# Altium PCB Bus_Interface_for_ABB-Welcome_v2.pcbdoc
Units mm, origin at the board's own origin, x right, y up, seen from the top; angles counter-clockwise.
Board outline 89.88 x 85.4 mm, 2 copper layers (Top Layer, Bottom Layer); 60 components, 36 nets, 173 pads, 82 vias.
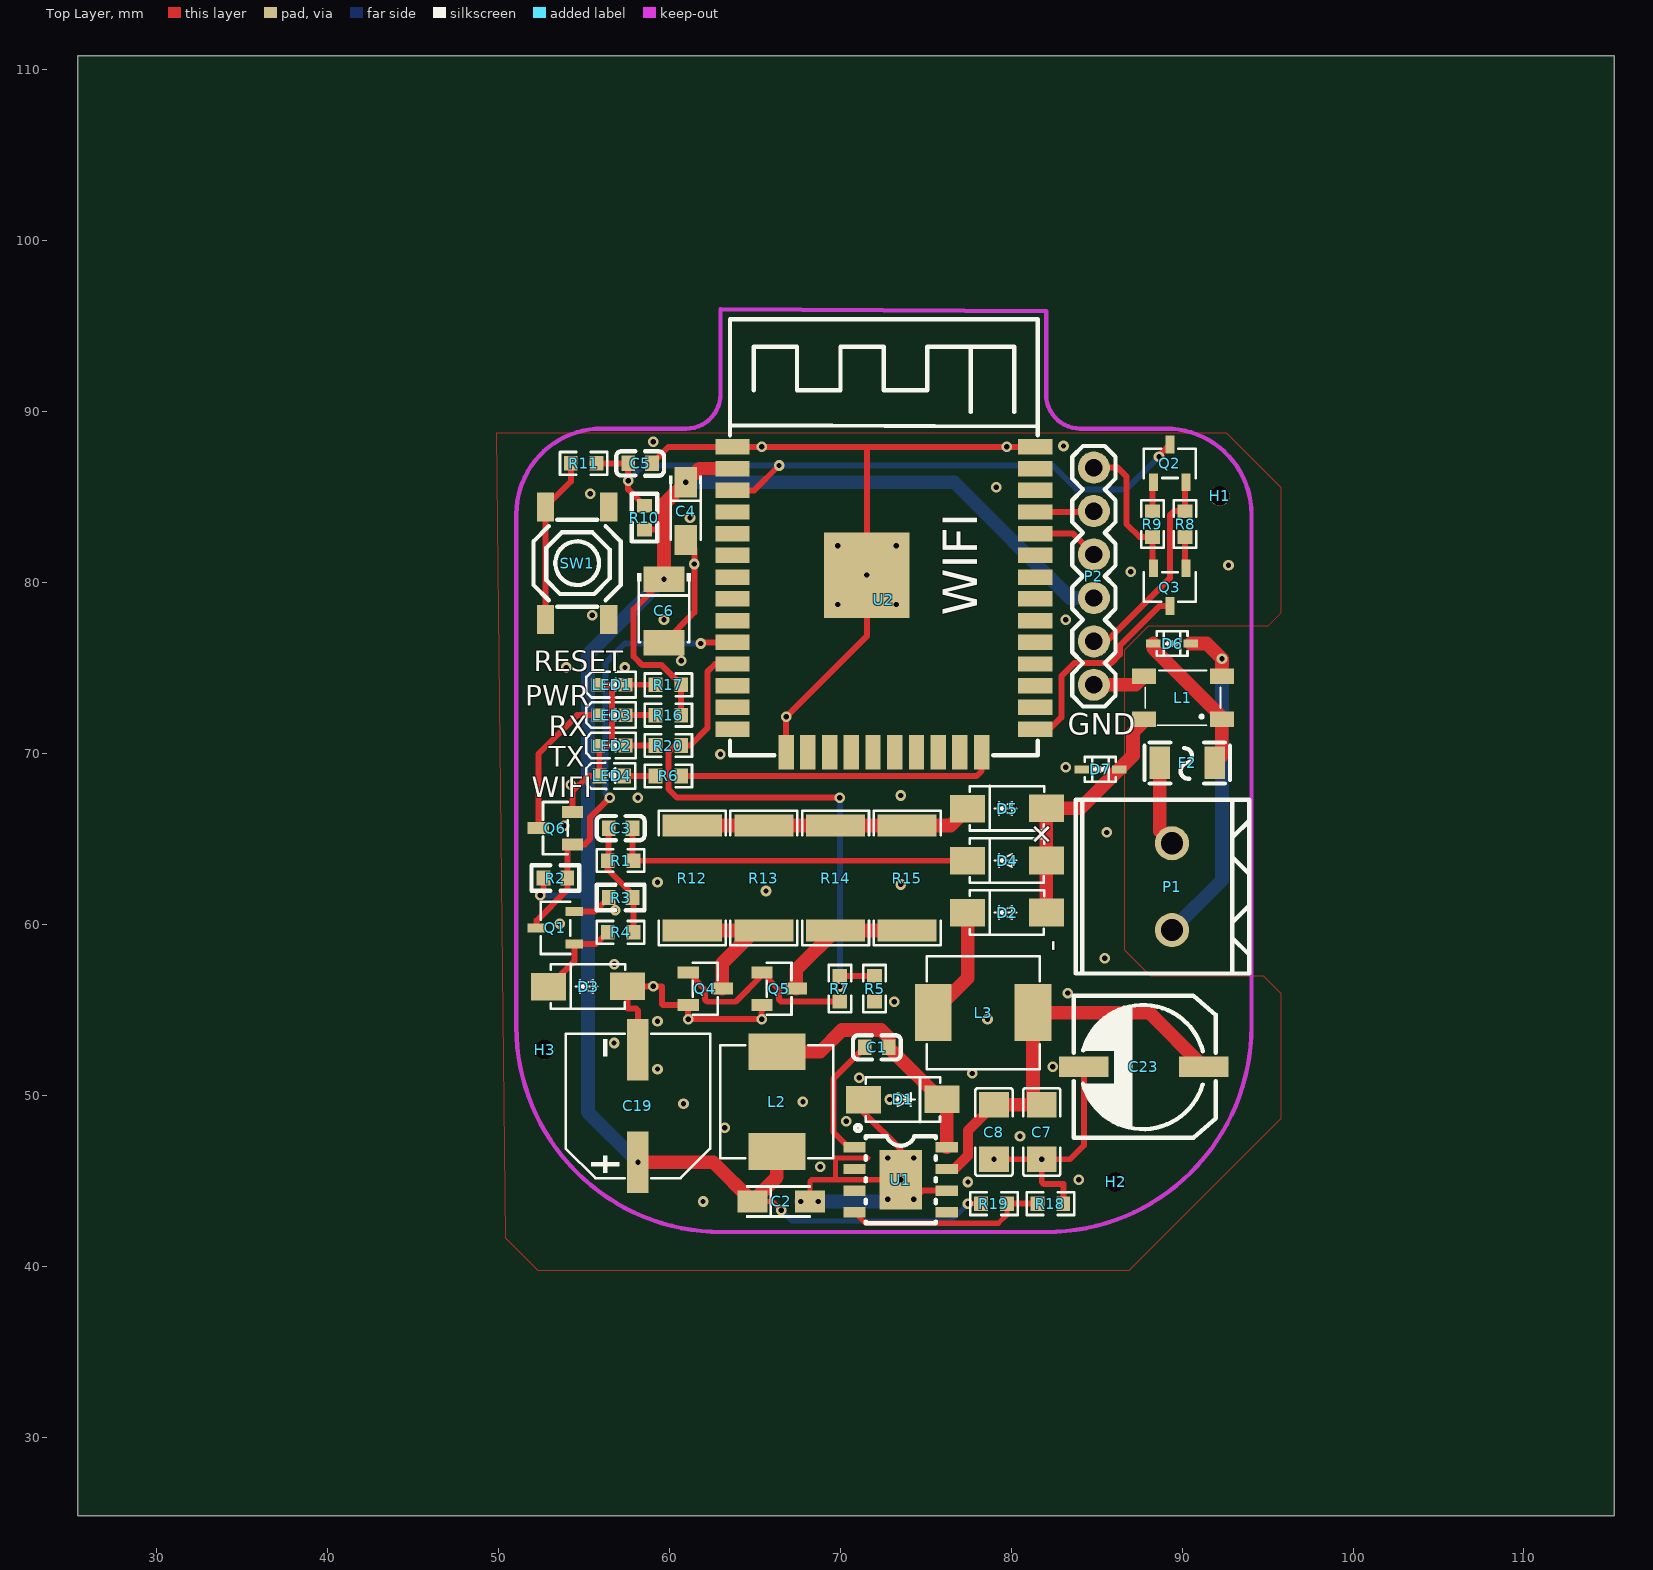
[diagram p0: Top Layer view]
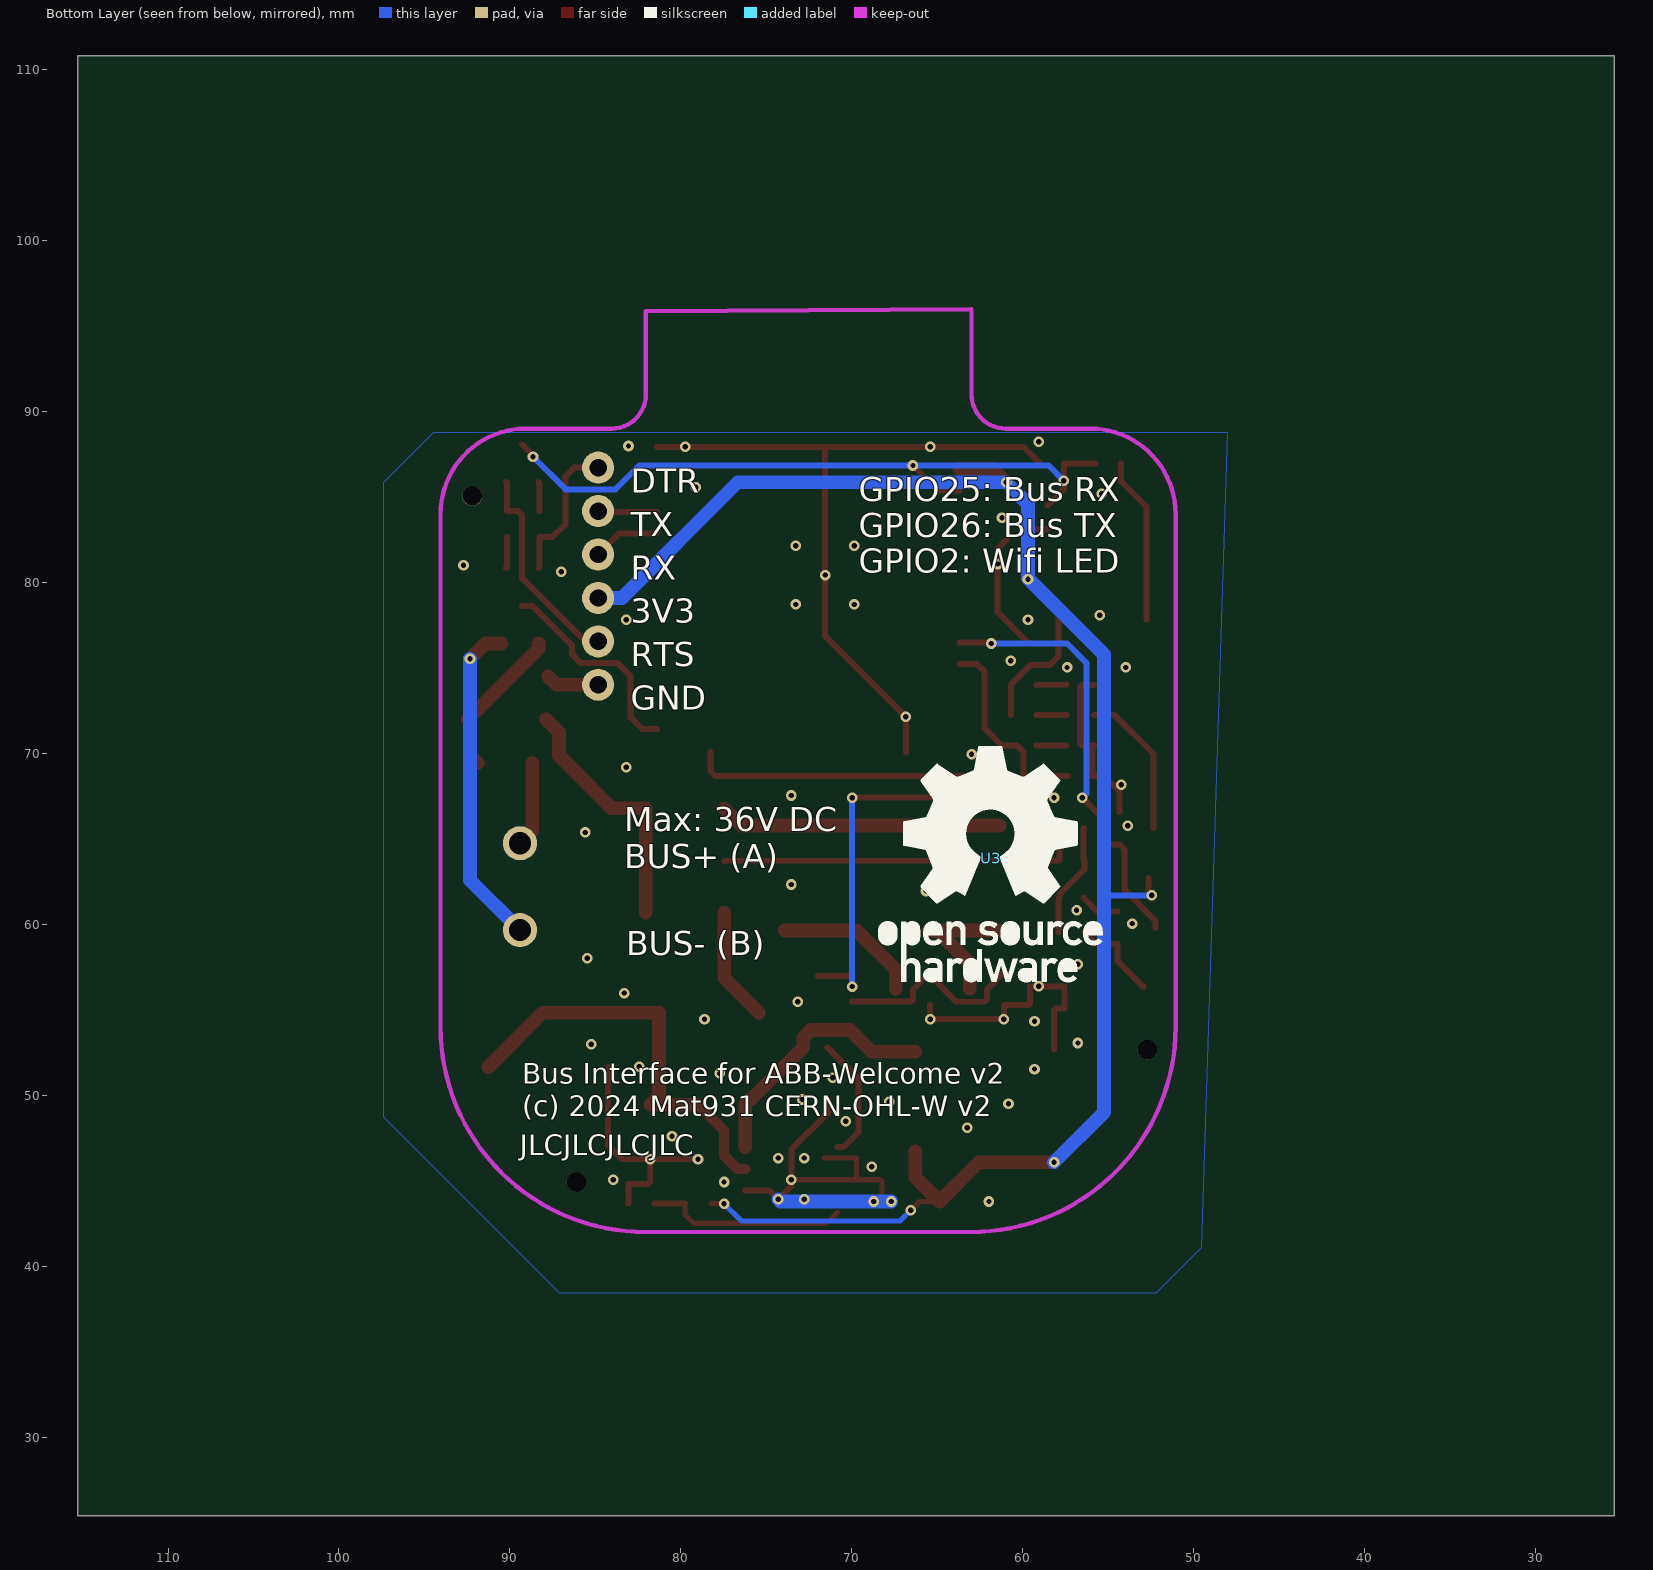
[diagram p1: Bottom Layer view, seen from below]

## Layer stack, top to bottom
Top Layer: signal copper (thickness not stored)
Dielectric: dielectric 0.32, FR-4, Dk 4.8
Bottom Layer: signal copper (thickness not stored)

## Board outline
115.282,25.4 25.4,25.4 25.4,110.8 115.282,110.8

## Components (designator, comment, footprint, x,y, rotation, side; value= is the part's Value field where it differs from the comment)
C1 "10nF" C0603#1 72.14,52.794 r180 top
C2 "10uF" CAP-SMD_L3.2-W1.6-RD-C7171 66.552,43.777 r0 top
C3 "68nF" C0603#1 57.154,65.621 r180 top
C4 "10uF" CAP-SMD_L3.2-W1.6-RD-C7171 60.964,84.163 r270 top
C5 "100nF" C0603#2 58.297,86.957 r180 top
C6 "100uF" CASE-B_3528 59.694,78.321 r270 top
C7 "2.2uF" C1206 81.792,47.841 r90 top
C8 "2.2uF" C1206 78.998,47.841 r90 top
C19 "470uF" CAP-SMD_BD8.0-L8.3-W8.3-LS9.0-FD 58.17,49.365 r90 top
C23 "100uF" CAP-SMD_BD8.0-L8.3-W8.3-RD 87.761,51.651 r0 top
D1 "SS24" SMA_L4.3-W2.6-LS5.0-FD 73.664,49.746 r0 top
D2 "SS24" SMA_L4.3-W2.6-LS5.0-FD 79.76,60.668 r180 top
D3 "SS24" SMA_L4.3-W2.6-LS5.0-FD 55.249,56.35 r180 top
D4 "SS24" SMA_L4.3-W2.6-LS5.0-FD 79.76,63.716 r180 top
D5 "SS24" SMA_L4.3-W2.6-LS5.0-FD 79.76,66.764 r180 top
D6 "SD36C_C502537" SOD-323_L1.7-W1.3-LS2.7-BI 89.412,76.416 r180 top
D7 "SD36C_C502537" SOD-323_L1.7-W1.3-LS2.7-BI 85.221,69.05 r0 top
F2 "nSMD005" F1206 90.301,69.431 r0 top
H1 "Tooling Hole" "TOOLING HOLE JLCPCB" 92.206,85.052 r0 top
H2 "Tooling Hole" "TOOLING HOLE JLCPCB" 86.11,44.92 r0 top
H3 "Tooling Hole" "TOOLING HOLE JLCPCB" 52.709,52.667 r0 top
L1 "ACT45B-510-2P-TL003" IND-SMD_4P-L4.5-W3.2-TL 90.047,73.241 r180 top
L2 "100uH" IND-SMD_L7.1-W6.6 66.298,49.619 r270 top
L3 "100uH" IND-SMD_L7.1-W6.6 78.363,54.826 r0 top
LED1 "Red" LED0603-RD 56.646,74.003 r0 top
LED2 "Yellow" LED0603-RD-YELLOW 56.646,70.447 r0 top
LED3 "Yellow" LED0603-RD-YELLOW 56.646,72.225 r0 top
LED4 "Blue" LED0603-FD_BLUE 56.646,68.669 r0 top
P1 "WJ500V-5.08-2P-14-00A" CONN-TH_2P-P5.00_WJ500V-5.08-2P 89.412,62.192 r90 top
P2 "FTDI Header" "FTDI HEADER" 84.84,80.353 r90 top
Q1 "S8050_C2146" SOT-23-3_L3.0-W1.7-P0.95-LS2.9-BR 53.344,59.779 r0 top
Q2 "S8050_C2146" SOT-23-3_L3.0-W1.7-P0.95-LS2.9-BR 89.285,86.957 r270 top
Q3 "S8050_C2146" SOT-23-3_L3.0-W1.7-P0.95-LS2.9-BR 89.285,79.718 r90 top
Q4 "2N7002" SOT-23-3_L2.9-W1.3-P1.90-LS2.4-BR 62.107,56.223 r180 top
Q5 "2N7002" SOT-23-3_L2.9-W1.3-P1.90-LS2.4-BR 66.425,56.223 r180 top
Q6 "2N7002" SOT-23-3_L2.9-W1.3-P1.90-LS2.4-BR 53.344,65.621 r0 top
R1 "100kΩ" R0603#1 57.154,63.716 r180 top
R2 "10K" R0603#2 53.344,62.7 r180 top
R3 "10K" R0603#2 57.154,61.557 r0 top
R4 "1kΩ" R0603#1 57.154,59.525 r180 top
R5 "1kΩ" R0603#1 72.013,56.223 r90 top
R6 "1kΩ" R0603#1 59.948,68.669 r0 top
R7 "75Ω" R0603#1 69.981,56.223 r270 top
R8 "100kΩ" R0603#1 90.174,83.401 r270 top
R9 "100kΩ" R0603#1 88.269,83.401 r90 top
R10 "10K" R0603#2 58.551,83.782 r270 top
R11 "150Ω" R0603#1 54.995,86.957 r0 top
R12 "820Ω" R2512 61.345,62.7 r90 top
R13 "820Ω" R2512 65.536,62.7 r90 top
R14 "820Ω" R2512 69.727,62.7 r90 top
R15 "820Ω" R2512 73.918,62.7 r90 top
R16 "150Ω" R0603#1 59.948,72.225 r0 top
R17 "1kΩ" R0603#1 59.948,74.003 r0 top
R18 "3.3kΩ" R0603#1 82.3,43.65 r180 top
R19 "5.6kΩ" R0603#1 78.998,43.65 r180 top
R20 "150Ω" R0603#1 59.948,70.447 r0 top
SW1 "TS-1187A-B-A-B" SW-SMD_4P-L5.1-W5.1-P3.70-LS6.5-TL-2 54.614,81.115 r90 top
U1 "TPS5430DDAR" ESOP-8_L4.9-W3.9-P1.27-LS6.0-TL-EP 73.537,45.047 r0 top
U2 "ESP32-SOLO-1" WIFIM-SMD_38P-L25.5-W18.0-P1.27 72.558,78.989 r0 top
U3 "logo open source hardware" "LOGO OPEN SOURCE HARDWARE" 61.853,63.843 r0 bottom

## Footprints (in the part's own frame and the unit in brackets; to place one, negate y for a bottom-side part, rotate by r counter-clockwise, add the part's x,y. Pads: shape width x height; smd on the part's side, far side on the other; paste and mask are expansions set on the pad)
C0603#1 [mm]
  rect 0.8x0.9 smd paste+0 mask+0.051: 1(-0.7,0) 2(0.7,0)
  silkscreen extent -1.41,-0.71 1.39,0.72
C0603#2 [mm]
  rect 0.8x0.9 smd paste+0 mask+0.102: 1(-0.7,0) 2(0.7,0)
  silkscreen extent -1.4,-0.7 1.4,0.72
C1206 [mm]
  rect 1.485x1.728 smd paste-100 mask+0.051: 1(-1.593,0) 2(1.593,0)
  silkscreen extent -2.56,-1.09 2.56,1.09
CAP-SMD_BD8.0-L8.3-W8.3-LS9.0-FD [mm]
  rect 3.61x1.26 smd paste+0 mask+0.051: 1(-3.295,0) 2(3.295,0)
  silkscreen extent -4.23,-4.23 4.23,4.23
CAP-SMD_BD8.0-L8.3-W8.3-RD [mm]
  rect 2.9x1.2 smd paste+0 mask+0.102: 1(3.5,-0.005) 2(-3.5,0.005)
  silkscreen extent -4.1,-4.15 4.21,4.16
CAP-SMD_L3.2-W1.6-RD-C7171 [mm]
  rect 1.758x1.296 smd paste+0 mask+0.051: 1(-1.686,0) 2(1.686,0)
  silkscreen extent -2.06,-0.95 1.68,0.95
CASE-B_3528 [mm]
  rect 1.506x2.376 smd paste+0 mask+0.051: 1(-1.861,0) 2(1.861,0)
  silkscreen extent -2.21,-1.55 1.83,1.55
CONN-TH_2P-P5.00_WJ500V-5.08-2P [mm]
  round 2 hole 1.3 paste+0 mask+0.051: 1(-2.54,0) 2(2.54,0)
  silkscreen extent -5.08,-4.52 5.08,5.64
ESOP-8_L4.9-W3.9-P1.27-LS6.0-TL-EP [mm]
  rect 1.3x0.6 smd paste+0 mask+0.051: 1(-2.7,1.905) 2(-2.7,0.635) 3(-2.7,-0.635) 4(-2.7,-1.905) 5(2.7,-1.905) 6(2.7,-0.635) 7(2.7,0.635) 8(2.7,1.905)
  rect 2.5x3.5 smd paste+0 mask+0.051: 9(0,0)
  silkscreen extent -2.67,-2.55 2.05,3.2
F1206 [mm]
  rect 1.2x1.9 smd paste+0 mask+0.102: 1(-1.6,0) 2(1.6,0)
  silkscreen extent -2.5,-1.2 2.5,1.2
"FTDI HEADER" [mil]
  round 74 hole 40 paste+0 mask+4: 1(-250,0) 2(-150,0) 3(-50,0) 4(50,0) 5(150,0) 6(250,0)
  silkscreen extent -300,-50 300,50
IND-SMD_4P-L4.5-W3.2-TL [mm]
  rect 1.4x0.9 smd paste+0 mask+0.051: 1(-2.28,1.25) 2(-2.28,-1.25) 3(2.28,-1.25) 4(2.28,1.25)
  silkscreen extent -2.2,-1.6 2.2,1.6
IND-SMD_L7.1-W6.6 [mm]
  rect 2.15x3.32 smd paste+0 mask+0.051: 1(-2.913,0) 2(2.913,0)
  silkscreen extent -3.3,-3.3 3.3,3.3
LED0603-FD_BLUE [mm]
  rect 0.8x0.9 smd paste+0 mask+0.051: 1(-0.72,0) 2(0.72,0)
  silkscreen extent -1.5,-0.76 1.38,0.76
LED0603-RD [mm]
  rect 0.8x0.8 smd paste+0 mask+0.051: 1(-0.799,-0.003) 2(0.799,0.004)
  silkscreen extent -1.49,-0.75 1.39,0.76
LED0603-RD-YELLOW [mm]
  rect 0.8x0.8 smd paste+0 mask+0.051: 1(-0.799,-0.003) 2(0.799,0.004)
  silkscreen extent -1.49,-0.75 1.39,0.76
"LOGO OPEN SOURCE HARDWARE" [mm]
  silkscreen extent -6.52,-6.56 6.61,7.24
R0603#1 [mm]
  rect 0.806x0.864 smd paste-100 mask+0.051: 1(-0.753,0) 2(0.753,0)
  silkscreen extent -1.39,-0.66 1.39,0.66
R0603#2 [mm]
  rect 0.8x0.9 smd paste+0 mask+0.102: 1(-0.7,0) 2(0.7,0)
  silkscreen extent -1.4,-0.75 1.4,0.76
R2512 [mm]
  rect 1.283x3.456 smd paste-100 mask+0.051: 1(-3.066,0) 2(3.066,0)
  silkscreen extent -3.94,-1.96 3.94,1.96
SMA_L4.3-W2.6-LS5.0-FD [mm]
  rect 2.046x1.62 smd paste+0 mask+0.051: 1(-2.304,-0.009) 2(2.304,0.009)
  silkscreen extent -2.17,-1.32 2.19,1.29
SOD-323_L1.7-W1.3-LS2.7-BI [mm]
  rect 0.845x0.455 smd paste+0 mask+0.051: 1(-1.098,0) 2(1.098,0)
  silkscreen extent -0.9,-0.73 0.9,0.73
SOT-23-3_L2.9-W1.3-P1.90-LS2.4-BR [mm]
  rect 1.25x0.7 smd paste+0 mask+0.051: 1(1,-0.95) 2(1,0.95) 3(-1,0)
  silkscreen extent -0.73,-1.53 0.73,1.53
SOT-23-3_L3.0-W1.7-P0.95-LS2.9-BR [mm]
  rect 1.037x0.532 smd paste+0 mask+0.051: 1(1.101,-0.95) 2(1.101,0.95) 3(-1.101,0)
  silkscreen extent -0.86,-1.53 0.86,1.53
SW-SMD_4P-L5.1-W5.1-P3.70-LS6.5-TL-2 [mm]
  rect 1.7x1 smd paste+0 mask+0.051: 1(-3.3,1.85) 2(3.3,1.85) 3(-3.3,-1.85) 4(3.3,-1.85)
  silkscreen extent -2.55,-2.55 2.55,2.55
"TOOLING HOLE JLCPCB" [mm]
  round 1.152 hole 1.152 unplated paste+0: ""(0,0)
  Top Layer pour cut-out: -0.7,0 -0.631,0.304 -0.436,0.547 -0.156,0.682 0.156,0.682 0.436,0.547 0.631,0.304 0.7,0 0.7,0 0.631,-0.304 0.436,-0.547 0.156,-0.682 -0.156,-0.682 -0.436,-0.547 -0.631,-0.304 -0.7,0 -0.7,0
  Bottom Layer pour cut-out: -0.7,0 -0.631,0.304 -0.436,0.547 -0.156,0.682 0.156,0.682 0.436,0.547 0.631,0.304 0.7,0 0.7,0 0.631,-0.304 0.436,-0.547 0.156,-0.682 -0.156,-0.682 -0.436,-0.547 -0.631,-0.304 -0.7,0 -0.7,0
WIFIM-SMD_38P-L25.5-W18.0-P1.27 [mm]
  rect 2x0.9 smd paste+0 mask+0.051: 1(-8.85,8.93) 2(-8.85,7.66) 3(-8.85,6.39) 4(-8.85,5.12) 5(-8.85,3.85) 6(-8.85,2.58) 7(-8.85,1.31) 8(-8.85,0.04) 9(-8.85,-1.23) 10(-8.85,-2.5) 11(-8.85,-3.77) 12(-8.85,-5.04) 13(-8.85,-6.31) 14(-8.85,-7.58) 25(8.85,-7.58) 26(8.85,-6.31) 27(8.85,-5.04) 28(8.85,-3.77) 29(8.85,-2.5) 30(8.85,-1.23) 31(8.85,0.04) 32(8.85,1.31) 33(8.85,2.58) 34(8.85,3.85) 35(8.85,5.12) 36(8.85,6.39) 37(8.85,7.66) 38(8.85,8.93)
  rect 0.9x2 smd paste+0 mask+0.051: 15(-5.715,-8.93) 16(-4.445,-8.93) 17(-3.175,-8.93) 18(-1.905,-8.93) 19(-0.635,-8.93) 20(0.635,-8.93) 21(1.905,-8.93) 22(3.175,-8.93) 23(4.445,-8.93) 24(5.715,-8.93)
  rect 5x5 smd paste+0 mask+0.051: 39(-1,1.43)
  silkscreen extent -9,-9.1 9,16.4

## Via types
v1: diameter 0.62, hole 0.31, Top Layer to Bottom Layer, tented both sides, 82 vias

## Nets (pads, with @x,y where several pads share a name; then routed paths per layer and width w, separated by ;. In a path a pad name is that pad's centre, name@x,y a point inside that pad or via, vN(x,y) a via of type N, cw(c..) or ccw(c..) an arc to the next point about the centre after c; other vN are vias at no path point)
3V3: C2.1 C4.1 C6.1 C19.1 L2.2 P2.3 R2.2 R10.2 R16.2 R17.2 R19.2 U2.2 | length 120.4
  Top Layer w0.3: C2.1 66.044,43.777 v1(66.552,43.269) ; v1(77.474,43.65) R19.2
  Top Layer w0.35: v1(52.455,61.684) 52.644,61.873 R2.2 ; R10.2 59.694,83.082 ; v1(59.694,80.181) 57.916,78.403 57.916,75.654 58.424,75.146 59.558,75.146 R17.2 R16.2
  Top Layer w0.8: v1(58.17,46.07) 62.573,46.07 C2.1 66.298,45.209 L2.2 ; v1(59.694,80.181) 59.694,84.579 v1(60.964,85.849) 61.764,86.649 U2.2
  Bottom Layer w0.3: v1(66.552,43.269) 67.187,42.634 76.458,42.634 v1(77.474,43.65)
  Bottom Layer w0.35: v1(52.455,61.684) 55.086,61.684 55.249,61.521
  Bottom Layer w0.8: v1(58.17,46.07) 55.249,48.992 55.249,75.781 59.694,80.226 59.694,84.579 v1(60.964,85.849) 76.676,85.849 83.443,79.083 P2.3
BUS_PWR: C7.2 C8.2 C23.1 L3.2 U1.7 | length 24.9
  Top Layer w0.6: U1.7@76.237,45.682 76.712,45.682 77.474,46.444 77.474,47.909 C8.2
  Top Layer w0.8: C8.2 C7.2 81.276,49.95 L3.2 88.081,54.826 C23.1
BUS_RX: C3.1 D4.2 R1.1 | length 21.5
  Top Layer w0.35: C3.1 57.854,63.769 R1.1 ; R1.1@57.908,63.716 D4.2@77.456,63.706
BUS_RX_PIN: Q1.3 Q6.1 R2.1 U2.10 | length 25.7
  Top Layer w0.35: Q1.3 52.243,60.202 54.044,62.003 R2.1 54.044,64.371 Q6.1 55.061,64.671 55.376,64.986 55.376,66.256 v1(56.519,67.399) ; v1(61.853,76.416) 61.926,76.489 U2.10
  Bottom Layer w0.35: v1(56.519,67.399) 56.265,67.653 56.265,75.273 57.408,76.416 v1(61.853,76.416)
BUS_TX: D5.2 R12.2 R13.2 R14.2 R15.2 | length 16.5
  Top Layer w0.8: R12.2 R15.2 76.468,65.766 D5.2
BUS_TX_PIN: R5.2 R7.1 R20.2 U2.11 | length 33.9
  Top Layer w0.35: R20.2 60.329,70.447 59.948,70.066 59.948,67.907 60.456,67.399 v1(69.981,67.399) ; R20.2@60.702,70.447 61.218,70.447 62.234,71.463 62.234,74.765 62.689,75.22 U2.11 ; v1(69.981,56.35) R7.1 R5.2
  Bottom Layer w0.35: v1(69.981,56.35) v1(69.981,67.399)
D0: Q3.3 U2.25 | length 12.6
  Top Layer w0.35: U2.25@81.408,71.41 82.247,71.41 82.935,72.098 82.935,74.511 83.697,75.273 85.856,75.273 86.364,75.781 86.364,76.289 88.691,78.616 Q3.3
D2_2: D2.2 L3.1 | length 6.7
  Top Layer w0.8: L3.1 77.456,56.832 D2.2
DTR: P2.6 Q3.2 R9.1 | length 8.6
  Top Layer w0.35: P2.6 86.237,86.703 86.745,86.195 86.745,83.401 87.515,82.647 R9.1 ; R9.1 88.269,80.885 Q3.2
EN: C5.2 Q2.3 R10.1 R11.2 U2.3 | length 41.8
  Top Layer w0.35: R11.2 C5.2 v1(57.597,85.945) 57.597,85.436 R10.1 ; U2.3 64.974,85.379 v1(66.425,86.83) ; v1(88.65,87.338) 88.65,87.423 Q2.3
  Bottom Layer w0.35: v1(57.597,85.945) 58.482,86.83 v1(66.425,86.83) 82.427,86.83 83.824,85.433 86.745,85.433 v1(88.65,87.338)
F2_1: F2.1 P1.2 | length 5
  Top Layer w0.8: F2.1 88.701,65.443 P1.2
GND: C2.2 C4.2 C5.1 C6.2 C7.1 C8.1 C19.2 C23.2 D1.1 D3.1 D7.1 L1.3 LED1.1 LED2.1 LED4.1 P2.1 Q1.2 Q4.2 Q5.2 Q6.2 R3.1 R5.1 R18.1 SW1.3 SW1.4 U1.6 U1.9 U2.1 U2.15 U2.38 U2.39 | length 119.4
  Top Layer w0.3: C2.2 68.238,44.955 68.33,45.047 v1(73.537,45.047) ; 69.727,45.047 69.727,46.317 71.632,46.317
  Top Layer w0.35: Q6.2 54.344,67.764 55.249,68.669 LED4.1 55.926,70.364 LED2.1 ; Q1.2 55.626,60.729 R3.1 ; LED2.1 56.516,70.444 56.646,70.574 56.646,72.225 56.646,73.876 56.521,74 LED1.1 ; C19.2 58.17,54.953 58.043,55.08 57.553,55.08 D3.1 v1(59.064,56.359) 59.567,56.359 59.567,55.334 59.628,55.273 Q4.2 ; C5.1 59.959,87.919 U2.1 v1(65.415,87.919) v1(79.742,87.919) U2.38 ; C6.2 61.472,78.238 v1(61.472,81.066) 61.472,81.969 C4.2 ; Q4.2 v1(61.106,54.445) v1(65.409,54.445) Q5.2 ; U2.15 v1(66.843,72.135) 71.558,76.85 v1(71.558,80.419) 71.558,87.919 ; D1.1@71.36,49.736 71.36,49.002 73.537,46.825 v1(73.537,45.047) 73.537,44.666 v1(74.299,43.904) 74.807,44.412 U1.6@76.237,44.412 ; v1(78.998,46.248) v1(81.792,46.248) ; R18.1 83.053,44.793 81.919,44.793 81.792,44.92 v1(81.792,46.248) ; C23.2 84.261,47.066 83.443,46.248 v1(81.792,46.248)
  Top Layer w0.8: P2.1 87.279,74.003 L1.3
  Bottom Layer w0.8: v1(67.695,43.777) 74.172,43.777 v1(74.299,43.904)
  other v1: 61.98,43.777 68.711,43.777 72.775,43.904 77.474,44.92 83.951,45.047 68.838,45.809 72.775,46.317 74.299,46.317 80.522,47.587 63.25,48.095 70.362,48.476 60.837,49.492 67.822,49.619 72.902,49.746 71.124,51.016 77.728,51.27 59.313,51.524 82.427,51.651 85.244,52.971 56.773,53.048 59.313,54.318 78.617,54.445 73.156,55.461 83.316,55.969 56.787,57.659 85.475,58.001 53.598,60.033 56.854,60.807 65.663,61.938 73.537,62.319 59.313,62.446 85.602,65.367 53.852,65.748 58.17,67.399 73.537,67.526 54.233,68.161 83.189,69.177 62.996,69.939 53.979,75.019 57.408,75.019 60.71,75.4 59.694,77.813 83.189,77.813 55.503,78.067 69.854,78.702 73.283,78.702 86.999,80.607 92.714,80.988 69.854,82.131 73.283,82.131 61.218,83.782 55.376,85.179 79.125,85.56 83.062,87.973 59.059,88.227
L1_1: D6.2 F2.2 L1.1 | length 8.9
  Top Layer w0.8: D6.2 88.314,76.13 L1.1@92.454,71.991 ; F2.2@91.901,69.431 92.327,69.857 L1.1
L1_2: D6.1 L1.2 P1.1 | length 20.3
  Top Layer w0.8: D6.1 91.444,76.416 v1(92.333,75.527) L1.2@92.328,74.491
  Bottom Layer w0.8: P1.1 92.333,62.573 v1(92.333,75.527)
L1_4: D2.1 D4.1 D5.1 D7.2 L1.4 | length 14.9
  Top Layer w0.8: D2.1 D5.1 84.042,66.773 D7.2 87.126,69.857 87.126,71.223 L1.4@87.894,71.991
LED1_2: LED1.2 R17.1 | length 1.7
  Top Layer w0.35: LED1.2@57.446,74.005 R17.1
LED2_2: LED2.2 R20.1 | length 1.7
  Top Layer w0.35: LED2.2@57.446,70.449 R20.1
LED3_1: LED3.1 Q6.3 | length 8.8
  Top Layer w0.35: Q6.3 52.344,69.955 54.611,72.221 LED3.1
LED3_2: LED3.2 R16.1 | length 1.7
  Top Layer w0.35: LED3.2@57.446,72.227 R16.1
LED_PIN: R6.2 U2.24 | length 18.8
  Top Layer w0.35: R6.2 77.982,68.669 78.273,68.96 U2.24
Q1_1: D3.2 Q1.1 R4.2 | length 5.4
  Top Layer w0.35: D3.2 54.445,57.841 Q1.1 55.705,58.829 R4.2
Q2_1: Q2.1 R9.2 | length 1.7
  Top Layer w0.35: R9.2 88.269,85.789 Q2.1
Q3_1: Q3.1 R8.2 | length 1.9
  Top Layer w0.35: R8.2 90.174,80.88 Q3.1
Q4_1: Q4.1 Q5.1 R7.2 | length 11.8
  Top Layer w0.35: Q4.1 62.107,56.173 62.107,55.588 62.234,55.461 63.885,55.461 65.425,57.001 Q5.1 66.425,56.173 66.425,55.588 66.543,55.47 R7.2
Q4_3: Q4.3 R12.1 R13.1 | length 8.9
  Top Layer w0.8: R12.1 R13.1 65.01,59.634 63.108,57.732 Q4.3@63.108,56.223
Q5_3: Q5.3 R14.1 R15.1 | length 8.6
  Top Layer w0.8: Q5.3 67.425,57.332 R14.1 R15.1
R3_2: C3.2 R1.2 R3.2 R4.1 | length 6.7
  Top Layer w0.35: R1.2 56.4,63.2 57.855,61.745 R3.2@57.855,61.557 ; R1.2 56.454,63.769 C3.2 ; R3.2 57.907,61.504 R4.1
R6_1: LED4.2 R6.1 | length 1.8
  Top Layer w0.35: LED4.2 R6.1
RTS: P2.2 Q2.2 R8.1 | length 12.4
  Top Layer w0.35: P2.2 85.602,76.543 89.285,80.226 89.285,83.909 89.531,84.155 R8.1 ; R8.1 90.174,85.795 Q2.2
RX: P2.4 U2.34 | length 3.9
  Top Layer w0.35: U2.34 83.624,82.839 P2.4
S$68: 
SW1_2: R11.1 SW1.1 SW1.2 | length 9.8
  Top Layer w0.35: SW1.1 SW1.2 54.242,85.893 R11.1
TX: P2.5 U2.35 | length 3.5
  Top Layer w0.35: U2.35 84.786,84.109 P2.5
U1_1: C1.2 U1.1 | length 7.3
  Top Layer w0.35: U1.1 70.489,46.952 69.6,47.841 69.6,50.955 C1.2
U1_4: R18.2 R19.1 U1.4 | length 11.8
  Top Layer w0.3: U1.4 71.472,42.507 79.252,42.507 79.752,43.007 R19.1@79.752,43.65
  Top Layer w0.35: R19.1 R18.2
U1_8: C1.1 D1.2 L2.1 U1.8 | length 15.1
  Top Layer w0.8: L2.1 68.83,52.532 70.108,53.81 72.394,53.81 72.841,53.363 C1.1@72.841,52.794 ; C1.1 75.879,49.755 D1.2 76.237,49.486 U1.8@76.237,46.952
pads on no net: H1. H2. H3. U1.2 U1.3 U1.5 U2.4 U2.5 U2.6 U2.7 U2.8 U2.9 U2.12 U2.13 U2.14 U2.16 U2.17 U2.18 U2.19 U2.20 U2.21 U2.22 U2.23 U2.26 U2.27 U2.28 U2.29 U2.30 U2.31 U2.32 U2.33 U2.36 U2.37

## Polygon pours and split planes (outlines as drawn)
GND on Top Layer (solid): 49.915,88.735 92.587,88.735 95.762,85.56 95.762,78.194 95,77.432 88.015,77.432 86.618,76.035 86.618,58.509 88.142,56.985 94.746,56.985 95.762,55.969 95.762,48.603 86.872,39.713 52.328,39.713 50.423,41.618
GND on Bottom Layer (solid): 48.01,88.735 94.492,88.735 97.413,85.814 97.413,48.73 87.126,38.443 52.201,38.443 49.534,41.11

## Keep-outs
Keep-Out Layer:
  lines w0.254: 51.058,53.989 ccw(c63.058,53.989) 63.058,41.989 ; 51.058,83.989 cw(c56.058,83.989) 56.058,88.989 ; 60.996,88.989 ccw(c60.996,90.989) 62.996,90.989 ; 82.046,90.989 ccw(c84.046,90.989) 84.046,88.989 ; 82.058,41.989 ccw(c82.058,53.989) 94.058,53.989 ; 89.058,88.989 cw(c89.058,83.989) 94.058,83.989

## Silkscreen, mask and mechanical layers (free items; w line width, h text height)
Top Overlay:
  text "RESET" at 52.074,74.8 h1.2
  text "PWR" at 51.566,72.768 h1.2
  text "RX" at 52.963,70.99 h1.2
  text "TX" at 52.963,69.212 h1.2
  text "WIFI" at 51.947,67.434 h1.2
  text "+" at 82.795,65.1 h1.4 r135
  text "-" at 83,58.382 h1.4 r90
Bottom Overlay:
  text "DTR" at 82.935,85.241 h1.4
  text "TX" at 82.935,82.701 h1.4
  text "GPIO25: Bus RX / GPIO26: Bus TX / GPIO2: Wifi LED" at 69.6,80.542 h1.4
  text "RX" at 82.935,80.161 h1.4
  text "3V3" at 82.935,77.621 h1.4
  text "RTS" at 82.935,75.081 h1.4
  text "GND" at 82.935,72.541 h1.4
  text "Max: 36V DC" at 83.316,65.429 h1.4
  text "BUS+ (A)" at 83.316,63.27 h1.4
  text "BUS- (B)" at 83.189,58.19 h1.4
  text "Bus Interface for ABB-Welcome v2" at 89.285,50.67 h1.2
  text "(c) 2024 Mat931 CERN-OHL-W v2" at 89.285,48.765 h1.2
  text "JLCJLCJLCJLC" at 89.412,46.479 h1.2
Document:
  circle w0.35: c72.582,68.1 r30
  text "-> / Wires inserted into the / connector from the left / ->" at 84.713,64.228 h0.5

## Text inside footprints (layer, text, board x,y; h text height)
P2: Top Overlay "GND" at 83.316,71.082 h1.27
U2: Top Overlay "WIFI" at 78.019,78.029 h2.03 r90